# Altium PCB PCB2.PcbDoc
Units mm, origin at the board's own origin, x right, y up, seen from the top; angles counter-clockwise.
Board outline 132.7 x 96.03 mm, 2 copper layers (Top Layer, Bottom Layer); 57 components, 52 nets, 232 pads, 2 vias.
Unrouted connection lines stored in the file: 147.
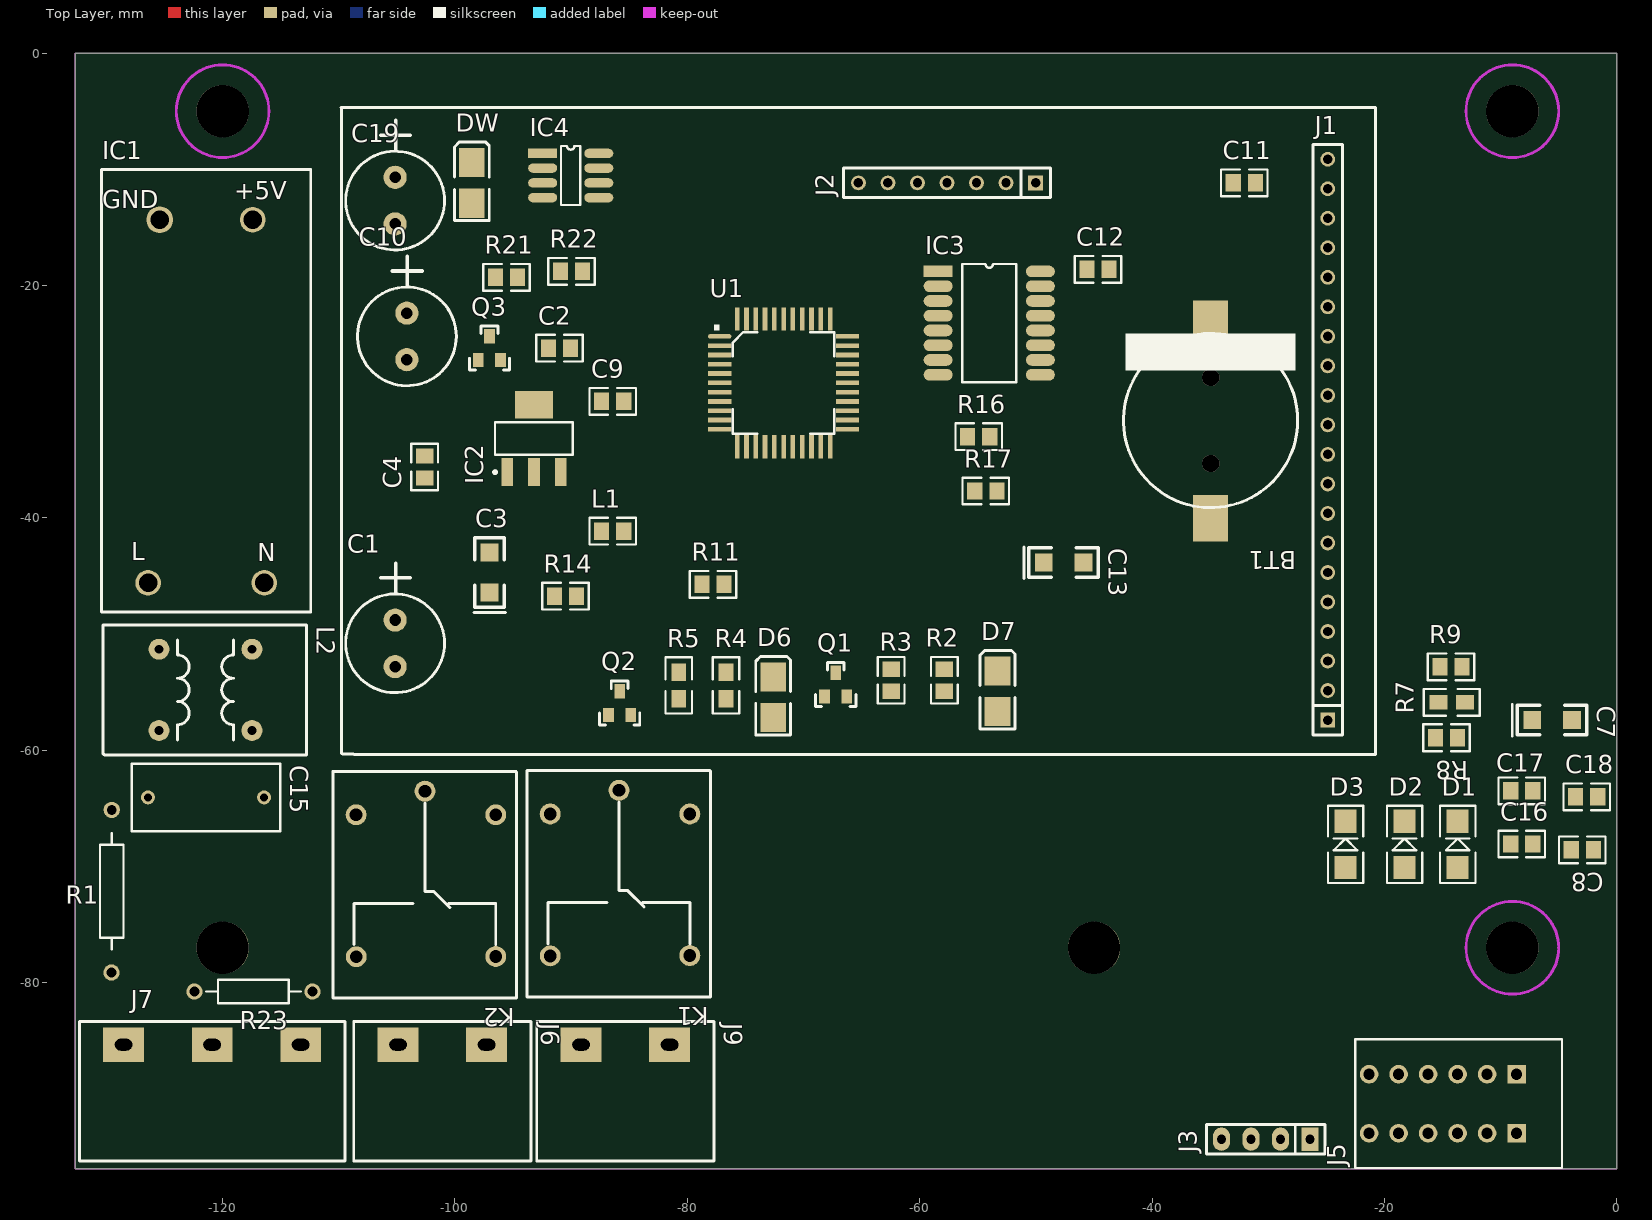
[diagram p0: Top Layer view]
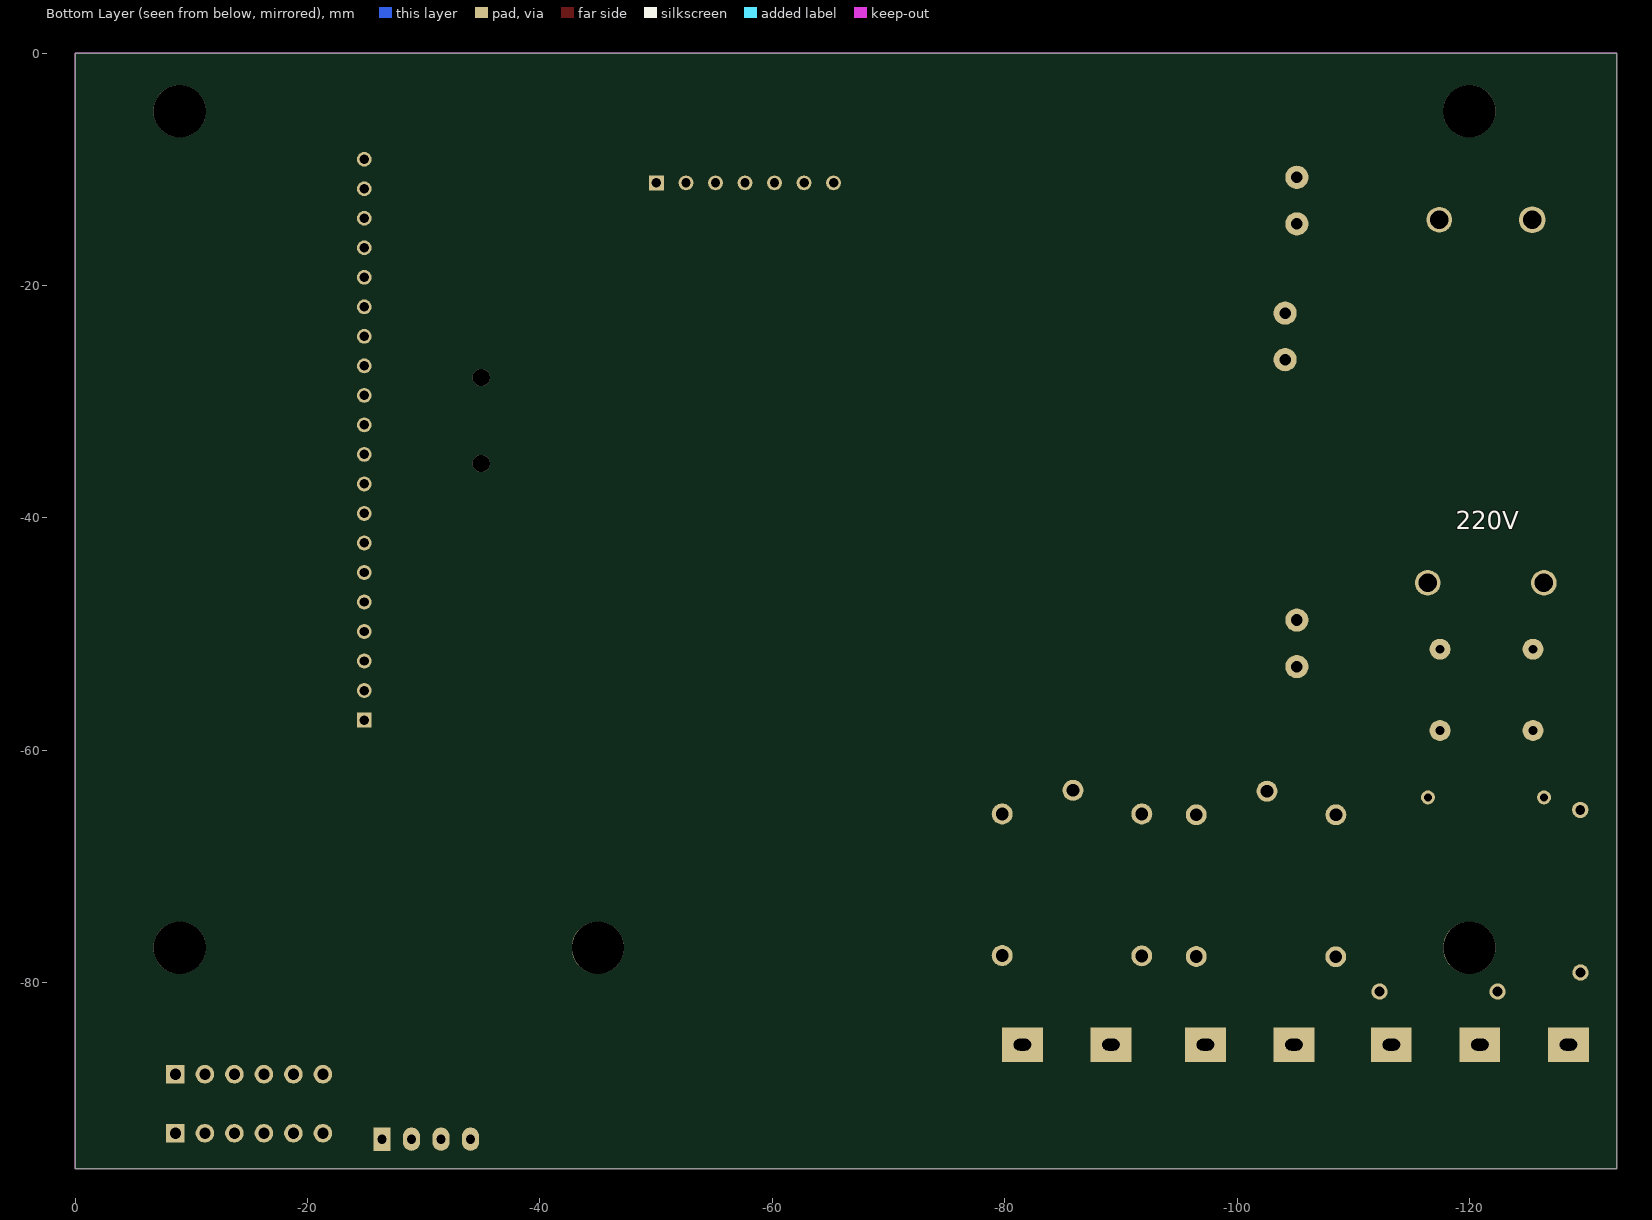
[diagram p1: Bottom Layer view, seen from below]

## Layer stack, top to bottom
Top Solder: solder mask 0.0102, Solder Resist, Dk 3.5
Top Layer: signal copper 0.0356
Dielectric1: dielectric 0.32, FR-4, Dk 4.8
Bottom Layer: signal copper 0.0356
Bottom Solder: solder mask 0.0102, Solder Resist, Dk 3.5

## Board outline
-132.7,-96.025 0,-96.025 0,0 -132.7,0 -132.7,-96.025

## Design rules (kind name [scope] priority, off if disabled: settings)
Clearance [All] p1: gap=0.254 ignorepadtopadclearanceinfootprint=FALSE except(0: Arc-Hole Track-Hole SMDPad-Hole THPad-Hole Via-Hole Fill-Hole Poly-Hole Region-Hole Text-Hole)
PolygonConnect [All] p1: connectstyle=Relief reliefconductorwidth=0.254 reliefentries=4 polygonreliefangle="90 Angle" airgapwidth=0.254
RoutingVias [All] p1: holewidth=0.711 width=1.27 viastyle="Through Hole" minholewidth=0.711 minwidth=1.27 maxholewidth=0.711 maxwidth=1.27
SilkToSolderMaskClearance SilkscreenOverComponentPads [IsPad] p1: minsilkscreentomaskgap=0.254 clearancetoexposedcopper=TRUE
SolderMaskExpansion [All] p1: expansion=0.102
Width [All] p1: maxlimit=0.254 minlimit=0.254 preferedwidth=0.254
29 further rules are at their usual default settings.

## Components (designator, comment, footprint, x,y, rotation, side; value= is the part's Value field where it differs from the comment)
BT1 "CR1220 3V" bat -34.975,-32.4 r180 top
C1 "470uF 16v" RB.2/.4 -105.156,-50.8 r90 top
C2 "104" 0805 -91.948,-25.4 r0 top
C3 "10uF 钽电容" 1206 -97.028,-44.704 r90 top
C4 "104" 0805 -102.616,-36.576 r90 top
C7 "10uF 钽电容" 1206 -5.588,-57.404 r0 top
C8 "104" 0805 -2.032,-68.58 r180 top
C9 "104" 0805 -87.376,-29.972 r0 top
C10 "220uF/10V" RB.2/.4 -104.14,-24.384 r90 top
C11 "104" 0805 -33.02,-11.176 r0 top
C12 "104" 0805 -45.625,-18.625 r0 top
C13 "10uF 钽电容" 1206 -47.625,-43.85 r0 top
C15 "0.1uf" DIP_10M -121.412,-64.008 r0 top
C16 "104" 0805 -9.144,-68.072 r0 top
C17 "104" 0805 -9.144,-63.5 r0 top
C18 "104" 0805 -3.556,-64.008 r0 top
C19 "470uF 16v" RB.2/.4 -105.156,-12.7 r90 top
D1 "VTS" M7 -13.716,-70.104 r90 top
D2 "VTS" M7 -18.288,-70.104 r90 top
D3 "VTS" M7 -23.368,-70.104 r90 top
D6 "IN4001" IN4001 -72.618,-55.437 r90 top
D7 "IN4001" IN4001 -53.314,-54.929 r90 top
DW "5.6V" IN4001 -98.552,-11.176 r90 top
IC1 "AC-DC-5V" AC_DC_5V -121.412,-29.972 r90 top
IC2 "LM1117" LM1117 -95.504,-36.068 r90 top
IC3 "DS3231" SOP16 -58.42,-18.796 r0 top
IC4 "DS1232" DS1302-150MIL -92.456,-8.636 r0 top
J1 "20DIP" SIP20 -24.892,-57.404 r90 top
J2 "7DIP" SIP7 -50.038,-11.176 r180 top
J3 "4DIP" SIP4 -26.416,-93.472 r180 top
J5 "NTC传感器" PCB_2.54_6 -8.636,-92.964 r180 top
J6 "集热水泵" PCB_7.62*2 -101.092,-85.344 r0 top
J7 "220V 进线" PCB_7.62*3 -120.904,-85.344 r0 top
J9 "单相回水泵" PCB_7.62*2 -85.344,-85.344 r0 top
K1 "5V DC SJ" 继电器1-2 -85.8,-70.575 r270 top
K2 "5V DC SJ" 继电器1-2 -102.5,-70.65 r270 top
L1 "100uh" 0805 -87.376,-41.148 r0 top
L2 "" UU9.8共模 -125.476,-51.308 r0 top
Q1 "9014" 9014A1 -67.232,-53.333 r0 top
Q2 "9014" 9014A1 -85.826,-54.929 r0 top
Q3 "AO3401" 9014A1 -97.028,-24.384 r0 top
R1 "250V" DIP_14mm -129.54,-72.136 r270 top
R2 "1K" 0805 -57.886,-54.929 r90 top
R3 "1K" 0805 -62.458,-54.929 r90 top
R4 "1K" 0805TLJW -76.682,-54.421 r90 top
R5 "1K" 0805TLJW -80.746,-54.421 r90 top
R7 "2K" 0805TLJW -14.224,-55.88 r180 top
R8 "2K" 0805 -13.716,-58.928 r180 top
R9 "2K" 0805 -15.24,-52.832 r0 top
R11 "1K" 0805 -78.74,-45.72 r0 top
R14 "1R" 0805 -91.44,-46.736 r0 top
R16 "10K" 0805 -55.88,-33.02 r0 top
R17 "10K" 0805 -55.268,-37.694 r0 top
R21 "5.1K" 0805 -96.52,-19.304 r0 top
R22 "470R" 0805 -90.932,-18.796 r0 top
R23 "压敏电阻" AXIAL-0.4 -117.348,-80.772 r180 top
U1 "STC15L2K60" LQFP44 -71.628,-28.956 r0 top

## Footprints (in the part's own frame and the unit in brackets; to place one, negate y for a bottom-side part, rotate by r counter-clockwise, add the part's x,y. Pads: shape width x height; smd on the part's side, far side on the other; paste and mask are expansions set on the pad)
0805 [mm]
  rect 1.3x1.5 smd: 1(0,0) 2(1.9,0)
  silkscreen extent -1.05,-1.15 2.95,1.15
0805TLJW [mil]
  rect 60x50 smd: 1(-45,0) 2(45,0)
  silkscreen extent -95,-45 95,45
1206 [mil]
  rect 60x60 smd: 1(-67.5,0) 2(67.5,0)
  silkscreen extent -135,-54 118,53
9014A1 [mil]
  rect 36x47.24 smd: 1(-38,-80) 3(37,-80)
  rect 36x50 smd: 2(0,0)
  silkscreen extent -68,-114 68,35
AC_DC_5V [mm]
  round 2.2 hole 1.6: 1(-15.625,5) 2(-15.625,-5) 3(15.625,-4)
  round 2.3 hole 1.6: 4(15.625,4)
  silkscreen extent -18.13,-9 19.96,9
AXIAL-0.4 [mm] "Axial Device, Thru-Hole; 2 Leads; 0.4 in Pin Spacing"
  round 1.4 hole 0.85: 1(-5.08,0) 2(5.08,0)
  silkscreen extent -4.06,-1.02 4.06,1.02
bat [mm]
  rect 3x4 smd: 1(0,-9.1) 2(0,7.625)
  silkscreen extent -7.5,-8.27 7.5,6.72
DIP_10M [mm]
  round 1.2 hole 0.7: 1(-5.014,-0.048) 2(4.986,-0.048)
  silkscreen extent -6.41,-2.95 6.39,2.86
DIP_14mm [mm]
  round 1.4 hole 0.85: 1(-7,0) 2(7,-0.025)
  silkscreen extent -5,-1.02 5,1.02
DS1302-150MIL [mm]
  rect 2.5x0.8 smd: 1(0,0)
  oval 2.5x0.8 smd: 2(0,-1.27) 3(0,-2.54) 4(0,-3.81) 5(4.83,-3.81) 6(4.83,-2.54) 7(4.83,-1.27) 8(4.83,0)
  silkscreen extent 1.59,-4.44 3.25,0.64
IN4001 [mm]
  rect 2.5x2.2 smd: 1(-1.75,0) 2(1.75,0)
  silkscreen extent -3.25,-1.5 3.5,1.5
LM1117 [mm]
  rect 2.4x1 smd: 1(0,0) 2(0,-2.3) 3(0,-4.6)
  rect 2.4x3.3 smd: 2(5.8,-2.3)
  silkscreen extent -0.12,-5.65 4.3,1.17
LQFP44 [mm]
  oval 2x0.4 smd: 1(-5.591,4.57)
  rect 2x0.4 smd: 2(-5.591,3.77) 3(-5.591,2.97) 4(-5.591,2.17) 5(-5.591,1.37) 6(-5.591,0.57) 7(-5.591,-0.23) 8(-5.591,-1.03) 9(-5.591,-1.83) 10(-5.591,-2.63) 11(-5.591,-3.43) 23(5.409,-3.43) 24(5.409,-2.63) 25(5.409,-1.83) 26(5.409,-1.03) 27(5.409,-0.23) 28(5.409,0.57) 29(5.409,1.37) 30(5.409,2.17) 31(5.409,2.97) 32(5.409,3.77) 33(5.409,4.57)
  rect 0.4x2 smd: 12(-4.091,-4.93) 13(-3.291,-4.93) 14(-2.491,-4.93) 15(-1.691,-4.93) 16(-0.891,-4.93) 17(-0.091,-4.93) 18(0.709,-4.93) 19(1.509,-4.93) 20(2.309,-4.93) 21(3.109,-4.93) 22(3.909,-4.93) 34(3.909,6.07) 35(3.109,6.07) 36(2.309,6.07) 37(1.509,6.07) 38(0.709,6.07) 39(-0.091,6.07) 40(-0.891,6.07) 41(-1.691,6.07) 42(-2.491,6.07) 43(-3.291,6.07) 44(-4.091,6.07)
  silkscreen extent -6.1,-3.8 4.28,5.59
M7 [mm]
  rect 2x1.9 smd: 1(0,0) 2(4,-0.01)
  silkscreen extent -1.33,-1.53 5.32,1.51
PCB_2.54_6 [mm]
  rect 1.6x1.6 hole 0.96: 1(0,0) 1(0,-5.08)
  round 1.6 hole 0.96: 2(2.54,0) 2(2.54,-5.08) 3(5.08,0) 3(5.08,-5.08) 4(7.62,-5.08) 4(7.62,0) 5(10.16,-5.08) 5(10.16,0) 6(12.7,-5.08) 6(12.7,0)
  silkscreen extent -3.91,-8.08 13.89,3
PCB_7.62*2 [mm]
  rect 3.5x3 hole 1 slot 1.5 at 0 deg: 1(-3.81,0) 2(3.81,0)
  silkscreen extent -7.62,-10 7.62,2
PCB_7.62*3 [mm]
  rect 3.5x3 hole 1 slot 1.5 at 0 deg: 1(-7.62,0) 2(0,0) 3(7.62,0)
  silkscreen extent -11.43,-10 11.43,2
RB.2/.4 [mm]
  round 2 hole 1: 1(2.002,0) 2(-2.002,0)
  silkscreen extent -4.25,-4.25 6.9,4.25
SIP4 [mm]
  rect 1.5x2 hole 0.813: 1(0,0)
  oval 1.5x2 hole 0.813: 2(2.54,0) 3(5.08,0) 4(7.62,0)
  silkscreen extent -1.27,-1.27 8.89,1.27
SIP7 [mil]
  rect 50x50 hole 32: 1(0,0)
  round 50 hole 32: 2(100,0) 3(200,0) 4(300,0) 5(400,0) 6(500,0) 7(600,0)
  silkscreen extent -50,-50 650,50
SIP20 [mil]
  rect 50x50 hole 32: 1(0,0)
  round 50 hole 32: 2(100,0) 3(200,0) 4(300,0) 5(400,0) 6(500,0) 7(600,0) 8(700,0) 9(800,0) 10(900,0) 11(1000,0) 12(1100,0) 13(1200,0) 14(1300,0) 15(1400,0) 16(1500,0) 17(1600,0) 18(1700,0) 19(1800,0) 20(1900,0)
  silkscreen extent -50,-50 1950,50
SOP16 [mm]
  rect 2.5x1 smd: 1(0,0)
  oval 2.5x1 smd: 2(0,-1.27) 3(0,-2.54) 4(0,-3.81) 5(0,-5.08) 6(0,-6.35) 7(0,-7.62) 8(0,-8.89) 9(8.8,-8.89) 10(8.8,-7.62) 11(8.8,-6.35) 12(8.8,-5.08) 13(8.8,-3.81) 14(8.8,-2.54) 15(8.8,-1.27) 16(8.8,0)
  silkscreen extent 2.08,-9.52 6.72,0.64
UU9.8共模 [mm]
  round 1.8 hole 0.762: 1(0,-7) 1(0,0) 2(8,-7) 2(8,0)
  silkscreen extent -4.8,-9.1 12.7,2.1
继电器1-2 [mm]
  round 1.8 hole 1.1: 1(-7.125,-0.087) 2(7.099,6.009) 3(7.124,-6) 4(-5.093,6.009) 5(-5.093,-6.008)
  silkscreen extent -8.84,-8.01 10.66,7.79

## Part data
BT1: library part BATTERY, "Battery"
C1 C3 C10 C13 C19: library part EC
C2 C4 C9 C11 C12: library part CAP
C7: library part "Cap Pol2", "Polarized Capacitor (Axial)"
C8 C15 C16 C17 C18: library part Cap, "Capacitor"
D1 D2 D3: library part Diode, "Default Diode"
D6 D7: library part D
DW: library part DW
J1: library part CON20, "Connector"
J2: library part CON7, "Connector"
J3: library part CON4, "Connector"
J5: library part "Header 6", "Header, 6-Pin"
J6 J9: library part CON2, "Connector"
J7: library part "Header 3", "Header, 3-Pin"
K1 K2: library part RELAY-SPDT
L1: library part B4
L2: library part diangan
Q1 Q2: library part NPN, "NPN Transistor"
Q3: library part MOSFET-P, "P-Channel MOSFET"
R1 R7 R8 R9 R11 R16 R17 R21 R22 R23: library part Res2, "Resistor"
R2 R3 R4 R5 R14: library part RES2
U1: "STC15L,44pin"

## Free pads (board coordinates)
  round 4.5 hole 4.5: 0(-9,-77) 1(-120,-77) 2(-45,-77) 3(-9,-5) 4(-120,-5)

## Via types
v1: diameter 1.5, hole 1.5, Top Layer to Bottom Layer, 2 vias

## Nets (pads, with @x,y where several pads share a name; then routed paths per layer and width w, separated by ;. In a path a pad name is that pad's centre, name@x,y a point inside that pad or via, vN(x,y) a via of type N, cw(c..) or ccw(c..) an arc to the next point about the centre after c; other vN are vias at no path point)
A-OUT: J9.1 K2.3
A_GND: J7.1
ADJ: J1.3
BUSY: J2.2
CLK: J2.5 U1.42
CS: J1.6
D0: J1.7 U1.30
D1: J1.8 U1.31
D2: J1.9 U1.32
D3: J1.10 U1.33
D4: J1.11 U1.34
D5: J1.12 U1.35
D6: J1.13 U1.36
D7: J1.14 U1.37
DI: J2.6 U1.41
DO: J2.4 U1.43
DT_SCL: IC3.16 R16.1 U1.3
DT_SDA: IC3.15 R17.1 U1.2
GND: BT1.2 C1.2 C2.2 C3.2 C4.2 C7.2 C8.2 C9.2 C10.2 C11.2 C12.2 C13.2 C16.2 C17.2 C18.1 C18.2 C19.2 D1.1 D1.2 D2.1 D3.1 DW.1 IC1.4 IC2.1 IC3.5 IC3.6 IC3.7 IC3.8 IC3.9 IC3.10 IC3.11 IC3.12 IC3.13 IC4.3 IC4.4 J1.1 J1.20 J3.1 J5.5 Q1.3 Q2.3 R3.2 R5.2 R9.2 R11.1 U1.8 U1.16
L: J7.3 K1.3 K2.1 R1.2 R23.1
L_OUT: C15.1 IC1.1 L2.1
MK1: D6.1 K1.5 Q1.2
MQ1: R2.2 R3.1 U1.28
MQ2: R4.2 R5.1 U1.26
N: C15.2 IC1.2 J6.1 J7.2 J9.2 L2.2 R23.2
NetBT1_1: BT1.1 IC3.14
NetC11_1: C11.1 J1.2 J1.19
NetD7_1: D7.1 K2.5 Q2.2
NetIC1_3: IC1.3 R14.1
NetIC4_5: IC4.5 R22.1
NetJ6_2: J6.2 K1.1
NetL2_3: R1.1
NetQ1_1: Q1.1 R2.1
NetQ2_1: Q2.1 R4.1
NetQ3_2: Q3.2 R21.1 R22.2
NetR11_2: R11.2 U1.13
PEN: J2.3 U1.44
RD: J1.4 U1.25
RS: J1.15 U1.29
RST: J1.16 U1.38
RX: J3.2 U1.18
SD-: J2.7
ST: IC4.7 U1.23
T_1: C16.1 D3.2 J5.1 R7.2 U1.9
T_2: C17.1 D2.2 J5.3 R8.2 U1.7
T_CS: J2.1 U1.40
TX: J3.3 U1.19
VCC-3.3: C9.1 C10.1 IC2.2 J3.4 L1.1
VCC-3.3_M: C3.1 C4.1 C7.1 C8.1 C12.1 C13.1 IC3.2 L1.2 R7.1 R8.1 R9.1 R16.2 R17.2 U1.14
VDD: D6.2 D7.2 DW.2 IC4.1 IC4.2 IC4.8 K1.4 K2.4 Q3.3 R14.2 R21.2
VDD_INT: C1.1 C2.1 C19.1 IC2.3 Q3.1
WR: J1.5 U1.24
pads on no net: IC3.1 IC3.3 IC3.4 IC4.6 J1.17 J1.18 J5.2 J5.4 J5.6 K1.2 K2.2 U1.1 U1.4 U1.5 U1.6 U1.10 U1.11 U1.12 U1.15 U1.17 U1.20 U1.21 U1.22 U1.27 U1.39
copper on no net:
  other v1: -34.975,-35.325 -34.975,-27.925

## Keep-outs
Top Layer:
  circle w0.254: c-120,-5 r3.988
  circle w0.254: c-9,-5 r3.988
  circle w0.254: c-9,-77 r3.988
Keep-Out Layer:
  the board outline again, w0.1

## Silkscreen, mask and mechanical layers (free items; w line width, h text height)
Top Overlay:
  lines w0.254: -109.818,-4.675 -108.8,-4.675 ; -109.775,-60.3 -109.775,-4.757 ; -109.7,-60.325 -108.741,-60.325 ; -108.825,-4.693 -20.817,-4.693 ; -108.675,-60.35 -20.775,-60.35 ; -20.775,-60.317 -20.775,-4.7

## Text inside footprints (layer, text, board x,y; h text height)
IC1: Top Overlay "GND" at -130.337,-13.372 h1.52; Top Overlay "+5V" at -118.987,-12.597 h1.52; Top Overlay "L" at -127.862,-43.672 h1.52; Top Overlay "N" at -115.437,-42.172 h1.52 r180; Bottom Overlay "220V" at -118.825,-41 h1.52